# Altium PCB PiezoControlBoard.PcbDoc (part 2 of 3)
Units mm, origin at the board's own origin, x right, y up, seen from the top; angles counter-clockwise.
Board outline 90 x 115 mm, 4 copper layers (SIGNAL TOP, GND, PWR, SIGNAL BOT), stack 1.59 mm thick; 145 components, 86 nets, 512 pads, 287 vias.
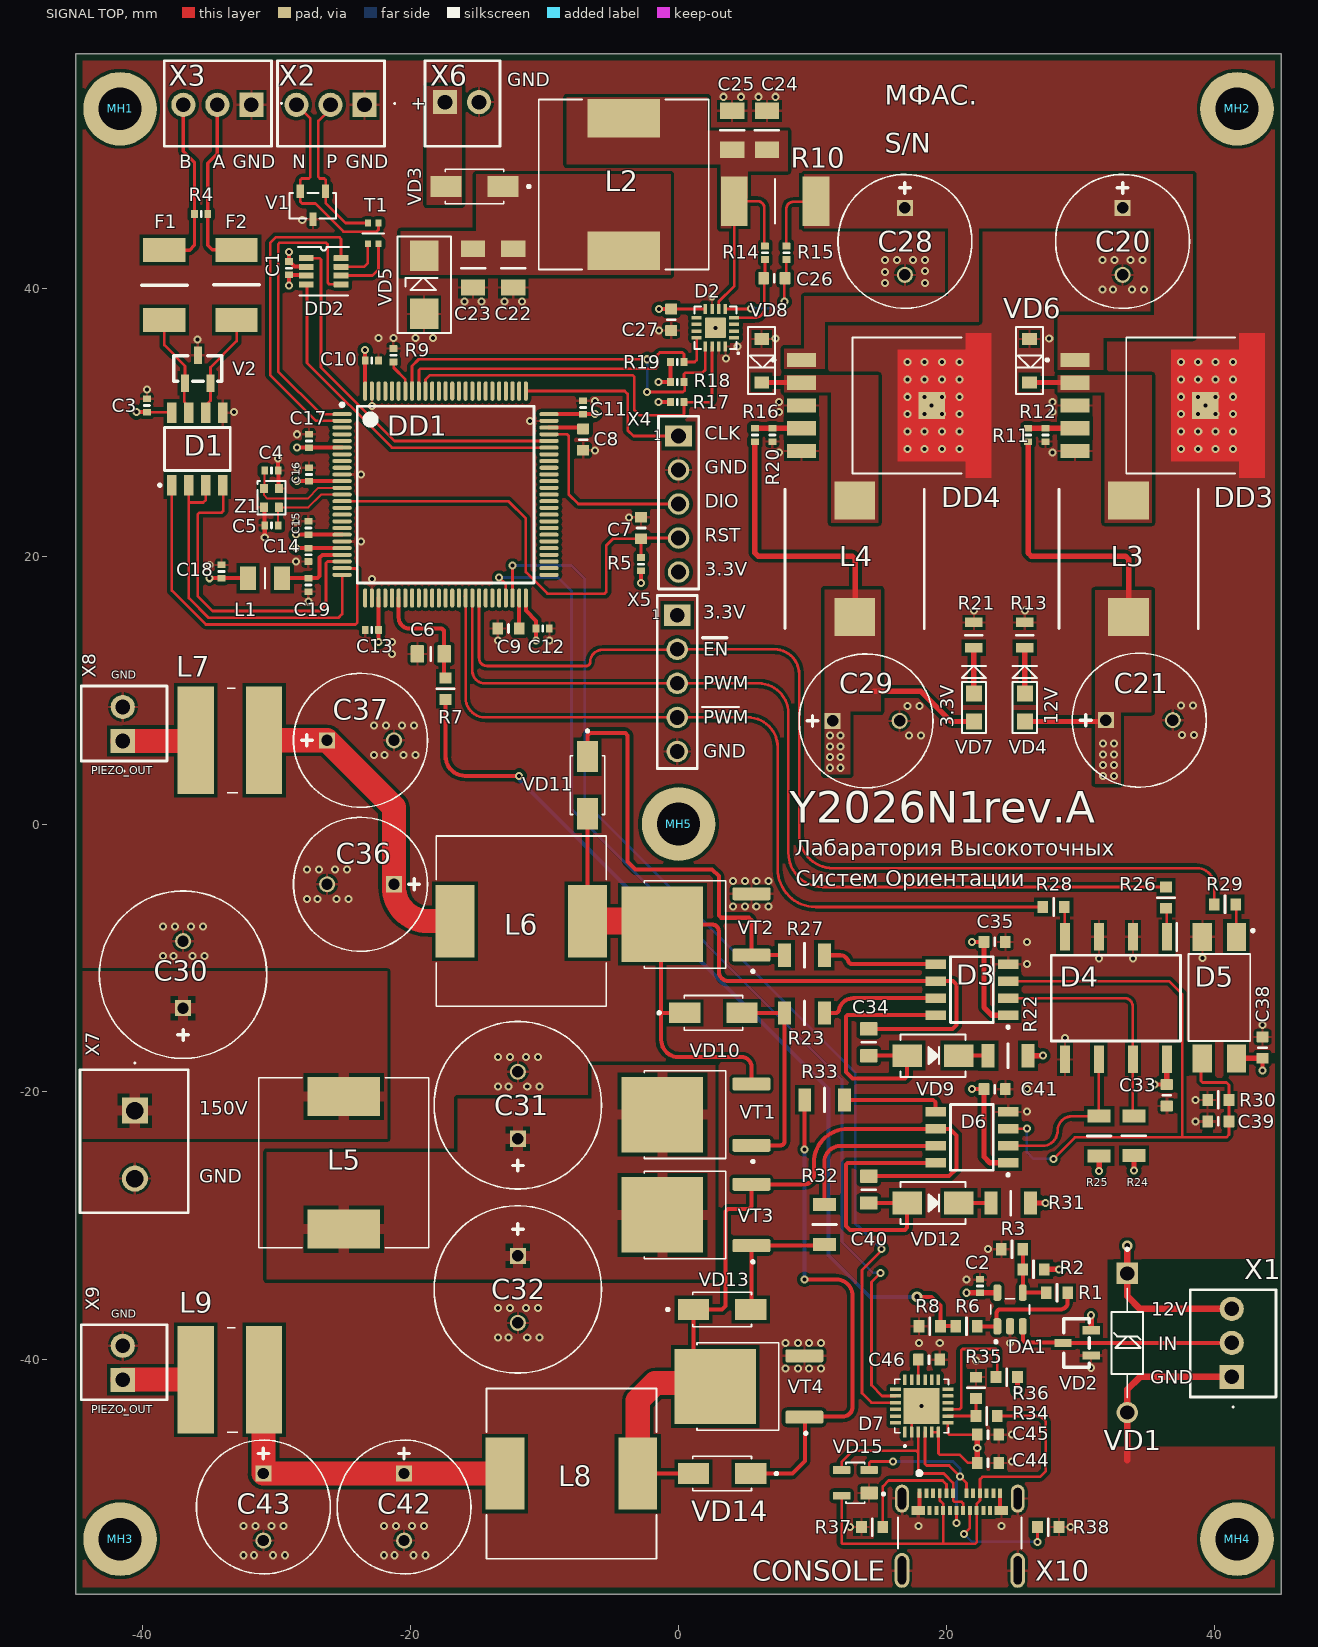
[diagram p0: SIGNAL TOP view]

## Part data (continued)
DA1: "Single Rail-to-Rail Operational Amplifier, SOT-23, TLV271IDBVR", Case/Package=SOT-23, Dual Supply Voltage=5V, Input Bias Current=60pA, Input Offset Voltage (Vos)=5mV, Manufacturer="Texas Instruments", Manufacturer Lifecycle Status=ACTIVE, Max Dual Supply Voltage=8V, Max Operating Temperature=125°C, Max Power Dissipation=201mW, Max Supply Voltage=16V, Min Dual Supply Voltage=1.35V, Min Operating Temperature=-40°C, Min Supply Voltage=2.7V, Nominal Supply Current=800µA, Operating Supply Current=625µA, Output Current=13mA, Power Supply Rejection Ratio (PSRR)=70dB, Supplier Part Number=2184654, Voltage Gain=110dB, Bandwidth=3MHz, Category="Amplifiers - Op Amps, Buffer, Instrumentation", Common Mode Rejection Ratio=69dB, ComponentLink1Description=https://sigma.octopart.com:443/177332311/technical_drawing/Texas-Instruments-TLV271IDBVR.pdf?src-supplier=Texas+Instruments, ComponentLink1URL=https://sigma.octopart.com:443/177332311/technical_drawing/Texas-Instruments-TLV271IDBVR.pdf?src-supplier=Texas+Instruments, ComponentLink2Description=https://octopart.com:443/opatz8j6/c1?t=xcKfiJBWjAmYsTfbSL-CzoOmzwEvjnPfYfSv82HYzKGs_6IgCZ6Y4Z1lF1bvJzEv39QWfXGgcZZnnapJK-Oyrd-ym6EThaYOJfbjIdY0gNOgQgkvB5ipi4TQKB-N_9Z4aF8oC4FEWWO1qQbGN_gEN6aHITD1x1gqD40gQs_ZLOpQbD32bAUiak8d48dFHYI_buWggoNQNLuwFJQIcVLm9iYp2q-f2WXUrehkCiEZXZGpi4kEl-P_ikKun8CbEnyYrMhl2WVMGYe1UiE5g9ZjThNOC2j0NOontvZ9pDSM0E2NdS-KvLoF94xRgWqBDz3UjNI_t0gqBymYZUMiW6_Jo37IGL5BO-oa7doWszXX2JJOG4V0X3qSIiHL2dBw451RtRk&src-supplier=Texas+Instruments, ComponentLink2URL=https://octopart.com:443/opatz8j6/c1?t=xcKfiJBWjAmYsTfbSL-CzoOmzwEvjnPfYfSv82HYzKGs_6IgCZ6Y4Z1lF1bvJzEv39QWfXGgcZZnnapJK-Oyrd-ym6EThaYOJfbjIdY0gNOgQgkvB5ipi4TQKB-N_9Z4aF8oC4FEWWO1qQbGN_gEN6aHITD1x1gqD40gQs_ZLOpQbD32bAUiak8d48dFHYI_buWggoNQNLuwFJQIcVLm9iYp2q-f2WXUrehkCiEZXZGpi4kEl-P_ikKun8CbEnyYrMhl2WVMGYe1UiE5g9ZjThNOC2j0NOontvZ9pDSM0E2NdS-KvLoF94xRgWqBDz3UjNI_t0gqBymYZUMiW6_Jo37IGL5BO-oa7doWszXX2JJOG4V0X3qSIiHL2dBw451RtRk&src-supplier=Texas+Instruments, ComponentLink3Description=https://sigma.octopart.com:443/175570406/technical_drawing/Texas-Instruments-TLV271IDBVR.pdf?src-supplier=Texas+Instruments, ComponentLink3URL=https://sigma.octopart.com:443/175570406/technical_drawing/Texas-Instruments-TLV271IDBVR.pdf?src-supplier=Texas+Instruments, ComponentLink4Description=https://sigma.octopart.com:443/169406034/technical_drawing/Texas-Instruments-TLV271IDBVR.pdf?src-supplier=Texas+Instruments, ComponentLink4URL=https://sigma.octopart.com:443/169406034/technical_drawing/Texas-Instruments-TLV271IDBVR.pdf?src-supplier=Texas+Instruments, ComponentLink5Description=https://sigma.octopart.com:443/155939316/technical_drawing/Texas-Instruments-TLV271IDBVR.pdf?src-supplier=Texas+Instruments, ComponentLink5URL=https://sigma.octopart.com:443/155939316/technical_drawing/Texas-Instruments-TLV271IDBVR.pdf?src-supplier=Texas+Instruments, ComponentLink6Description=https://sigma.octopart.com:443/102331370/technical_drawing/Texas-Instruments-TLV271IDBVR.pdf?src-supplier=Texas+Instruments, ComponentLink6URL=https://sigma.octopart.com:443/102331370/technical_drawing/Texas-Instruments-TLV271IDBVR.pdf?src-supplier=Texas+Instruments, ComponentLink7Description=https://sigma.octopart.com:443/49249325/technical_drawing/Texas-Instruments-TLV271IDBVR.pdf?src-supplier=Texas+Instruments, ComponentLink7URL=https://sigma.octopart.com:443/49249325/technical_drawing/Texas-Instruments-TLV271IDBVR.pdf?src-supplier=Texas+Instruments, ComponentLink8Description=https://datasheet.octopart.com:443/TLV271IDBVR-Texas-Instruments-datasheet-151134.pdf?src-supplier=Texas+Instruments, ComponentLink8URL=https://datasheet.octopart.com:443/TLV271IDBVR-Texas-Instruments-datasheet-151134.pdf?src-supplier=Texas+Instruments, ComponentLink9Description=https://datasheet.octopart.com:443/TLV271IDBVR-Texas-Instruments-datasheet-11536657.pdf?src-supplier=Upverter, ComponentLink9URL=https://datasheet.octopart.com:443/TLV271IDBVR-Texas-Instruments-datasheet-11536657.pdf?src-supplier=Upverter, ComponentLink10Description=https://datasheet.octopart.com:443/TLV271IDBVR.-Texas-Instruments-datasheet-66581739.pdf?src-supplier=element14+APAC, ComponentLink10URL=https://datasheet.octopart.com:443/TLV271IDBVR.-Texas-Instruments-datasheet-66581739.pdf?src-supplier=element14+APAC, ComponentLink11Description=https://datasheet.octopart.com:443/TLV271IDBVR.-Texas-Instruments-datasheet-62088949.pdf?src-supplier=element14+APAC, ComponentLink11URL=https://datasheet.octopart.com:443/TLV271IDBVR.-Texas-Instruments-datasheet-62088949.pdf?src-supplier=element14+APAC, ComponentLink12Description=https://datasheet.octopart.com:443/TLV271IDBVR.-Texas-Instruments-datasheet-37735837.pdf?src-supplier=Farnell, ComponentLink12URL=https://datasheet.octopart.com:443/TLV271IDBVR.-Texas-Instruments-datasheet-37735837.pdf?src-supplier=Farnell, ComponentLink13Description=https://datasheet.octopart.com:443/TLV271IDBVR-Texas-Instruments-datasheet-32026764.pdf?src-supplier=Farnell, ComponentLink13URL=https://datasheet.octopart.com:443/TLV271IDBVR-Texas-Instruments-datasheet-32026764.pdf?src-supplier=Farnell, ComponentLink14Description=https://datasheet.octopart.com:443/TLV271IDBVR-Texas-Instruments-datasheet-164418874.pdf?src-supplier=SHENGYU+ELECTRONICS, ComponentLink14URL=https://datasheet.octopart.com:443/TLV271IDBVR-Texas-Instruments-datasheet-164418874.pdf?src-supplier=SHENGYU+ELECTRONICS, ComponentLink15Description=https://datasheet.octopart.com:443/TLV271IDBVR-Texas-Instruments-datasheet-164361764.pdf?src-supplier=LCSC, ComponentLink15URL=https://datasheet.octopart.com:443/TLV271IDBVR-Texas-Instruments-datasheet-164361764.pdf?src-supplier=LCSC, ComponentLink16Description=https://datasheet.octopart.com:443/TLV271IDBVR-Texas-Instruments-datasheet-159117792.pdf?src-supplier=LCSC, ComponentLink16URL=https://datasheet.octopart.com:443/TLV271IDBVR-Texas-Instruments-datasheet-159117792.pdf?src-supplier=LCSC, ComponentLink17Description=https://datasheet.octopart.com:443/TLV271IDBVR-Texas-Instruments-datasheet-169977755.pdf?src-supplier=Burklin+Elektronik, ComponentLink17URL=https://datasheet.octopart.com:443/TLV271IDBVR-Texas-Instruments-datasheet-169977755.pdf?src-supplier=Burklin+Elektronik, ComponentLink18Description=https://datasheet.octopart.com:443/TLV271IDBVR-Texas-Instruments-datasheet-14138263.pdf?src-supplier=iiiC, ComponentLink18URL=https://datasheet.octopart.com:443/TLV271IDBVR-Texas-Instruments-datasheet-14138263.pdf?src-supplier=iiiC, ComponentLink19Description=https://datasheet.octopart.com:443/TLV271IDBVR-Texas-Instruments-datasheet-16079680.pdf?src-supplier=Factory+Futures, ComponentLink19URL=https://datasheet.octopart.com:443/TLV271IDBVR-Texas-Instruments-datasheet-16079680.pdf?src-supplier=Factory+Futures, ComponentLink20Description=https://datasheet.octopart.com:443/TLV271IDBVR-Texas-Instruments-datasheet-8443790.pdf?src-supplier=Jameco, ComponentLink20URL=https://datasheet.octopart.com:443/TLV271IDBVR-Texas-Instruments-datasheet-8443790.pdf?src-supplier=Jameco, ComponentLink21Description=https://datasheet.octopart.com:443/TLV271IDBVR-Texas-Instruments-datasheet-57216.pdf?src-supplier=DigiKey, ComponentLink21URL=https://datasheet.octopart.com:443/TLV271IDBVR-Texas-Instruments-datasheet-57216.pdf?src-supplier=DigiKey, ComponentLink22Description=https://datasheet.octopart.com:443/TLV271IDBVR-Texas-Instruments-datasheet-17699.pdf?src-supplier=Sierra+IC, ComponentLink22URL=https://datasheet.octopart.com:443/TLV271IDBVR-Texas-Instruments-datasheet-17699.pdf?src-supplier=Sierra+IC, ComponentLink23Description=http://sigma.octopart.com:80/reach_statement/Texas-Instruments-company-64.pdf?src-supplier=Compliance+Statements, ComponentLink23URL=http://sigma.octopart.com:80/reach_statement/Texas-Instruments-company-64.pdf?src-supplier=Compliance+Statements, ComponentLink24Description=http://sigma.octopart.com:80/conflict_mineral_statement/Texas-Instruments-company-63.pdf?src-supplier=Compliance+Statements, ComponentLink24URL=http://sigma.octopart.com:80/conflict_mineral_statement/Texas-Instruments-company-63.pdf?src-supplier=Compliance+Statements, Contact Plating=Gold, Gain Bandwidth Product=3MHz, Height=1.45mm, Lead Free="Lead Free", Length=2.9mm, Lifecycle Status=Production, Manufacturer Part Number=TLV271IDBVR, Max I/O Voltage=5mV, Nominal Gain Bandwidth Product=3MHz, Number of Amplifiers=1, Number of Channels=1, Number of Circuits=1, Number of Elements=1, Operating Supply Voltage=5V, Output Current per Channel=13mA, Packaging="Cut Tape", Pins=5, Power Dissipation=201mW, Pricing="10=0,505, 50=0,479, 100=0,432, 250=0,388, 500=0,369 (GBP)", Radiation Hardening=No, REACH SVHC=No, RoHS=Compliant, Schedule B="8542330000, 8542330000|8542330000|8542330000|8542330000|8542330000|8542330000|8542330000|8542330000|8542330000|8542330000|8542330000|8542330000|8542330000|8542330000|8542330000|8542330000|8542330000|8542330000|8542330000|8542330000|8542330000|8542330000|8542330000|85", Slew Rate=2.4V/µs, Stock=1000, Supplier=RS, Supplier 1=https://www.chipdip.ru/product/tlv271idbvr-texas-instruments-8001838236, Thickness=1.2mm, Width=1.6mm
DD1: "MCU 32-bit STM32F ARM Cortex M4F RISC 1024KB Flash 2.5V/3.3V 100-Pin LQFP Tray", Case/Package=LQFP, Clock Frequency=168MHz, Manufacturer=STMicroelectronics, Max Operating Temperature=85°C, Max Supply Voltage=3.6V, Min Operating Temperature=-40°C, Min Supply Voltage=1.8V, Nominal Supply Current=1.7uA, Package Quantity=90, Supplier Part Number=7468226, Address Bus Width=32b, Category=Microcontrollers, ComponentLink1Description=https://datasheet.ciiva.com/14132/stm32f407vgt6-tds-eng-14132567.pdf?src-supplier=Distrelec, ComponentLink1URL=https://datasheet.ciiva.com/14132/stm32f407vgt6-tds-eng-14132567.pdf?src-supplier=Distrelec, ComponentLink2Description=https://datasheet.ciiva.com/4842/dm00037051-492832-4842280.pdf?src-supplier=Mouser, ComponentLink2URL=https://datasheet.ciiva.com/4842/dm00037051-492832-4842280.pdf?src-supplier=Mouser, ComponentLink3Description=https://datasheet.ciiva.com/48687/001075599-da-01-en-mcu-32bt-1mb-stm32f407vgt6-lqfp-100-stm-48687547.pdf?src-supplier=Conrad, ComponentLink3URL=https://datasheet.ciiva.com/48687/001075599-da-01-en-mcu-32bt-1mb-stm32f407vgt6-lqfp-100-stm-48687547.pdf?src-supplier=Conrad, Core Architecture=ARM, Data Bus Width=32b, Frequency=168MHz, Height=1.45mm, Interface=I2C,SPI,USB,CAN,Ethernet,IrDA,UART,USART,LIN,EBI/EMI,I2S, Lead Free="Lead Free", Length=14.2mm, Manufacturer Part Number=STM32F407VGT6, Memory Format=FLASH, Memory Size=1024KB, Number of A/D Converters=3NUMBER, Number of ADC Channels=16, Number of Channels=16NUMBER, Number of D/A Converters=2NUMBER, Number of Ethernet Channels=1, Number of I2C Channels=3, Number of I/Os=82, Number of Programmable I/O=82, Number of PWM Channels=2, Number of SPI Channels=3, Number of Timers/Counters=14, Number of UART Channels=2, Number of USB Channels=1NUMBER, Oscillator Type=Internal, Packaging=Tray, Peripherals="Brown-out Detect/Reset,POR,PWM,WDT,DMA,LCD,I2C", Pins=100, Pricing="1=10,95, 10=10,07, 25=9,66, 100=8,5, 250=8,28 (GBP)", Radiation Hardening=No, RAM Size=196KB, Reach SVHC Compliant=No, RoHS=Yes, RoHS Compliant=Yes, Series="STM32 F4", Stock=813, Supplier 1=https://www.chipdip.ru/product/stm32f407vgt6, Watchdog Timer=Yes, Width=14.2mm
DD2: "EAR99 TCAN330 Tape & Reel (TR) CANbus interface transceiver 3.3V 1.45mm 1Mbps -40C~125C", Manufacturer="Texas Instruments", Category="Interface ICs", ComponentLink1Description=http://www.ti.com/lit/ds/symlink/tcan330.pdf?src-supplier=Digikey, ComponentLink1URL=http://www.ti.com/lit/ds/symlink/tcan330.pdf?src-supplier=Digikey, ComponentLink2Description=http://www.ti.com/general/docs/suppproductinfo.tsp?distId=10&amp;gotoUrl=http%3A%2F%2Fwww.ti.com%2Flit%2Fgpn%2Ftcan330&src-supplier=Digikey, ComponentLink2URL=http://www.ti.com/general/docs/suppproductinfo.tsp?distId=10&amp;gotoUrl=http%3A%2F%2Fwww.ti.com%2Flit%2Fgpn%2Ftcan330&src-supplier=Digikey, ComponentLink3Description=http://www.ti.com/general/docs/lit/getliterature.tsp?genericPartNumber=TCAN330&amp;&amp;fileType=pdf&src-supplier=Farnell, ComponentLink3URL=http://www.ti.com/general/docs/lit/getliterature.tsp?genericPartNumber=TCAN330&amp;&amp;fileType=pdf&src-supplier=Farnell, ComponentLink4Description=http://www.ti.com/general/docs/lit/getliterature.tsp?genericPartNumber=TCAN330&&fileType=pdf&src-supplier=Element14, ComponentLink4URL=http://www.ti.com/general/docs/lit/getliterature.tsp?genericPartNumber=TCAN330&&fileType=pdf&src-supplier=Element14, Height=1.45mm, Length=2.9mm, Manufacturer Part Number=TCAN330DCNT, Pricing 1="1=2,386, 10=1,915, 25=1,65 (USD)", RoHS=Yes, Stock 1=49, Supplier 1=https://www.chipdip.ru/product0/8005011845, Supplier Part Number 1=TCAN330DCNT, Thickness=1.1mm, Width=1.63mm
DD3: "LM2575HVR-12, Понижающий DC-DC преобразователь, Uвх=до 60В, Uвых=+12В, 1А, 52кГц [TO-263-5L] (=LM2575HVS-12)", Supplier 1=https://www.chipdip.ru/product/lm2575hvr-12-ponizhayuschiy-dc-dc-preobrazovatel-uvh-do-htc-9001087020
DD4: "LM2575HVS-3.3, Понижающий DC-DC преобразователь, Uвх=до 60В, Uвых=3.3В, 1А, 52кГц [TO-263-5L]", Supplier 1=https://www.chipdip.ru/product/lm2575hvs-3.3-ponizhayuschiy-dc-dc-preobrazovatel-umw-9001231209
F1 F2: "PTC Resettable Fuse 0.2A(hold) 0.4A(trip) 60VDC 40A 0.8W 0.02s 0.8Ohm SMD Solder Pad 1812 T/R", Case Code (Imperial)=1812, Case Code (Metric)=4532, Hold Current=200mA, Manufacturer=Littelfuse, Max Current Rating=40A, Max Operating Temperature=85°C, Max Voltage Rating (DC)=30V, Maximum Resistance 1 Hour (R1max)=4.4Ω, Min Operating Temperature=-40°C, Minimum Resistance Initial (Rmin)=1.4Ω, Power Dissipation=800mW, Supplier Part Number 1=9134053, Trip Current=400mA, Working Voltage=60V, Approvals="TUV, cULus", Case/Package=1812, Category="PTC Resettable Fuses", ComponentLink1Description=https://datasheet.octopart.com:443/1812L020-60DR-Littelfuse-datasheet-181956373.pdf?src-supplier=IHS, ComponentLink1URL=https://datasheet.octopart.com:443/1812L020-60DR-Littelfuse-datasheet-181956373.pdf?src-supplier=IHS, ComponentLink2Description=https://datasheet.octopart.com:443/1812L020-60DR-Littelfuse-datasheet-165518607.pdf?src-supplier=Farnell, ComponentLink2URL=https://datasheet.octopart.com:443/1812L020-60DR-Littelfuse-datasheet-165518607.pdf?src-supplier=Farnell, ComponentLink3Description=https://datasheet.octopart.com:443/1812L020-60DR-Littelfuse-datasheet-95953547.pdf?src-supplier=Farnell, ComponentLink3URL=https://datasheet.octopart.com:443/1812L020-60DR-Littelfuse-datasheet-95953547.pdf?src-supplier=Farnell, ComponentLink4Description=https://datasheet.octopart.com:443/1812L020-60DR-Littelfuse-datasheet-81917122.pdf?src-supplier=Farnell, ComponentLink4URL=https://datasheet.octopart.com:443/1812L020-60DR-Littelfuse-datasheet-81917122.pdf?src-supplier=Farnell, ComponentLink5Description=https://datasheet.octopart.com:443/1812L020-60DR-Littelfuse-datasheet-133510347.pdf?src-supplier=TME, ComponentLink5URL=https://datasheet.octopart.com:443/1812L020-60DR-Littelfuse-datasheet-133510347.pdf?src-supplier=TME, ComponentLink6Description=https://datasheet.octopart.com:443/1812L020-60DR-Littelfuse-datasheet-183575728.pdf?src-supplier=Sager+Electronics, ComponentLink6URL=https://datasheet.octopart.com:443/1812L020-60DR-Littelfuse-datasheet-183575728.pdf?src-supplier=Sager+Electronics, ComponentLink7Description=https://datasheet.octopart.com:443/1812L020-60DR-Littelfuse-datasheet-175882318.pdf?src-supplier=Sager+Electronics, ComponentLink7URL=https://datasheet.octopart.com:443/1812L020-60DR-Littelfuse-datasheet-175882318.pdf?src-supplier=Sager+Electronics, ComponentLink8Description=https://datasheet.octopart.com:443/1812L020-60DR-Littelfuse-datasheet-177174290.pdf?src-supplier=Burklin+Elektronik, ComponentLink8URL=https://datasheet.octopart.com:443/1812L020-60DR-Littelfuse-datasheet-177174290.pdf?src-supplier=Burklin+Elektronik, ComponentLink9Description=https://datasheet.octopart.com:443/1812L020-60DR-Littelfuse-datasheet-24577145.pdf?src-supplier=Future+Electronics, ComponentLink9URL=https://datasheet.octopart.com:443/1812L020-60DR-Littelfuse-datasheet-24577145.pdf?src-supplier=Future+Electronics, ComponentLink10Description=https://datasheet.octopart.com:443/1812L020-60DR-Littelfuse-datasheet-11773851.pdf?src-supplier=Fuses+Unlimited, ComponentLink10URL=https://datasheet.octopart.com:443/1812L020-60DR-Littelfuse-datasheet-11773851.pdf?src-supplier=Fuses+Unlimited, ComponentLink11Description=https://datasheet.octopart.com:443/1812L020-60DR-Littelfuse-datasheet-10288713.pdf?src-supplier=Fuses+Unlimited, ComponentLink11URL=https://datasheet.octopart.com:443/1812L020-60DR-Littelfuse-datasheet-10288713.pdf?src-supplier=Fuses+Unlimited, ComponentLink12Description=https://datasheet.octopart.com:443/1812L020-60DR-Littelfuse-datasheet-8764218.pdf?src-supplier=Fuses+Unlimited, ComponentLink12URL=https://datasheet.octopart.com:443/1812L020-60DR-Littelfuse-datasheet-8764218.pdf?src-supplier=Fuses+Unlimited, ComponentLink13Description=https://datasheet.octopart.com:443/1812L020-60DR-Littelfuse-datasheet-8701984.pdf?src-supplier=Fuses+Unlimited, ComponentLink13URL=https://datasheet.octopart.com:443/1812L020-60DR-Littelfuse-datasheet-8701984.pdf?src-supplier=Fuses+Unlimited, ComponentLink14Description=https://datasheet.octopart.com:443/1812L020-60DR-Littelfuse-datasheet-8499982.pdf?src-supplier=Fuses+Unlimited, ComponentLink14URL=https://datasheet.octopart.com:443/1812L020-60DR-Littelfuse-datasheet-8499982.pdf?src-supplier=Fuses+Unlimited, ComponentLink15Description=https://datasheet.octopart.com:443/1812L020-60DR-Littelfuse-datasheet-8330599.pdf?src-supplier=Fuses+Unlimited, ComponentLink15URL=https://datasheet.octopart.com:443/1812L020-60DR-Littelfuse-datasheet-8330599.pdf?src-supplier=Fuses+Unlimited, ComponentLink16Description=https://datasheet.octopart.com:443/1812L020-60DR-Littelfuse-datasheet-560439.pdf?src-supplier=Fuses+Unlimited, ComponentLink16URL=https://datasheet.octopart.com:443/1812L020-60DR-Littelfuse-datasheet-560439.pdf?src-supplier=Fuses+Unlimited, Country of Origin=Taiwan, Export Control Classification Number (ECCN) Code=EAR99, Harmonized Tariff Schedule (HTS) Code=8533.40.80.70, Height=1.25mm, Introduction Date=2012-08-07, Lead Free="Lead Free", Lifecycle Status=Production, Manufacturer Part Number=1812L020/60DR, Mount="Surface Mount", Number of Terminals=2, Packaging="Tape & Reel (TR)", Pricing 1="1500=0,187, 3000=0,185, 6000=0,182, 22500=0,177 (USD)", REACH SVHC=Yes, Resistance=1.4Ω, RoHS=Compliant, Supplier="Future Electronics", Supplier 1=https://www.chipdip.ru/product/1812l020-60dr-0.2a-60v-predohranitel-littelfuse-9000254948?from=similar_product_auto, Termination=SMD/SMT, Time to Trip=2s, Width=3.41mm
L1: library part CVH252009-4R7M, "Inductor Power Chip Shielded Multi-Layer 4.7uH 20% 1MHz Ferrite 1.1A 110mOhm DCR 1008 T/R", Manufacturer=Bourns, Supplier Part Number=1808878, Category="Fixed Inductors", ComponentLink1Description=https://datasheet.ciiva.com/8003/1610598-8003733.pdf?src-supplier=Element14, ComponentLink1URL=https://datasheet.ciiva.com/8003/1610598-8003733.pdf?src-supplier=Element14, ComponentLink2Description=https://datasheet.ciiva.com/7849/1610598-7849319.pdf?src-supplier=Element14, ComponentLink2URL=https://datasheet.ciiva.com/7849/1610598-7849319.pdf?src-supplier=Element14, ComponentLink3Description=https://datasheet.ciiva.com/22874/70301233-22874397.pdf?src-supplier=Allied+Electronics, ComponentLink3URL=https://datasheet.ciiva.com/22874/70301233-22874397.pdf?src-supplier=Allied+Electronics, ComponentLink4Description=https://datasheet.ciiva.com/3079/cvh-3079748.pdf?src-supplier=Avnet, ComponentLink4URL=https://datasheet.ciiva.com/3079/cvh-3079748.pdf?src-supplier=Avnet, Manufacturer Part Number=CVH252009-4R7M, Pricing="3000=25,352 (RUB)", RoHS=Yes, Stock=495, Supplier=Rs, Supplier 1=https://www.chipdip.ru/product0/8002027222
L2: "SMD Low Loss Power Inductor", Manufacturer=Codaca, Supplier Part Number=4044-SPRH127-101MCT-ND, Manufacturer Part Number=SPRH127-101M, Pricing="1=1,13, 10=0,93, 100=0,7645 (USD)", RoHS=No, Stock=3159, Supplier=Digikey, Supplier 1=https://www.chipdip.ru/product/sprh127-101m-100
L3 L4: library part B82464G4104M000, "Inductor Power Shielded Wirewound 100uH 20% 100KHz Ferrite 1.05A 0.22Ohm DCR Automotive T/R", Case/Package=SMD/SMT, DC Current=1.05A, DC Resistance (DCR)=220mΩ, Inductance=100µH, Inductance Tolerance=20%, Manufacturer=EPCOS, Max Operating Temperature=125°C, Min Operating Temperature=-55°C, Saturation Current=1.15A, Self Resonant Frequency=6.5MHz, Supplier Part Number 1=4960669, Test Frequency=100kHz, Category="Fixed Inductors", China RoHS=Compliant, ComponentLink1Description=https://datasheet.octopart.com:443/B82464G4104M000-EPCOS-datasheet-138895962.pdf?src-supplier=IHS, ComponentLink1URL=https://datasheet.octopart.com:443/B82464G4104M000-EPCOS-datasheet-138895962.pdf?src-supplier=IHS, ComponentLink2Description=https://datasheet.octopart.com:443/B82464G4104M000-EPCOS-datasheet-12510517.pdf?src-supplier=Newark, ComponentLink2URL=https://datasheet.octopart.com:443/B82464G4104M000-EPCOS-datasheet-12510517.pdf?src-supplier=Newark, ComponentLink3Description=https://datasheet.octopart.com:443/B82464G4104M000-EPCOS-datasheet-10671.pdf?src-supplier=Newark, ComponentLink3URL=https://datasheet.octopart.com:443/B82464G4104M000-EPCOS-datasheet-10671.pdf?src-supplier=Newark, ComponentLink4Description=https://datasheet.octopart.com:443/B82464G4104M000-EPCOS-datasheet-8324944.pdf?src-supplier=Future+Electronics, ComponentLink4URL=https://datasheet.octopart.com:443/B82464G4104M000-EPCOS-datasheet-8324944.pdf?src-supplier=Future+Electronics, ComponentLink5Description=https://datasheet.octopart.com:443/B82464G4104M000-EPCOS-datasheet-47871567.pdf?src-supplier=Future+Electronics, ComponentLink5URL=https://datasheet.octopart.com:443/B82464G4104M000-EPCOS-datasheet-47871567.pdf?src-supplier=Future+Electronics, ComponentLink6Description=https://datasheet.octopart.com:443/B82464G4104M000-EPCOS-datasheet-38579530.pdf?src-supplier=element14+APAC, ComponentLink6URL=https://datasheet.octopart.com:443/B82464G4104M000-EPCOS-datasheet-38579530.pdf?src-supplier=element14+APAC, ComponentLink7Description=https://datasheet.octopart.com:443/B82464G4104M-EPCOS-datasheet-714.pdf?src-supplier=TME, ComponentLink7URL=https://datasheet.octopart.com:443/B82464G4104M-EPCOS-datasheet-714.pdf?src-supplier=TME, ComponentLink8Description=https://datasheet.octopart.com:443/B82464G4104M-EPCOS-datasheet-519163.pdf?src-supplier=Farnell, ComponentLink8URL=https://datasheet.octopart.com:443/B82464G4104M-EPCOS-datasheet-519163.pdf?src-supplier=Farnell, ComponentLink9Description=https://datasheet.octopart.com:443/B82464G4104M-EPCOS-datasheet-499776.pdf?src-supplier=Farnell, ComponentLink9URL=https://datasheet.octopart.com:443/B82464G4104M-EPCOS-datasheet-499776.pdf?src-supplier=Farnell, ComponentLink10Description=https://datasheet.octopart.com:443/B82464-G4104-M-EPCOS-datasheet-550296.pdf?src-supplier=Verical, ComponentLink10URL=https://datasheet.octopart.com:443/B82464-G4104-M-EPCOS-datasheet-550296.pdf?src-supplier=Verical, Contact Plating=Tin, Core Material=Ferrite, Country of Origin=Germany, Depth=10.4mm, Export Control Classification Number (ECCN) Code=EAR99, Harmonized Tariff Schedule (HTS) Code=8504.50.80.00, Height=4.8mm, Introduction Date=2002-08-13, Lead Free="Lead Free", Length=10.4mm, Lifecycle Status=EOL, Manufacturer Part Number=B82464G4104M000, Max Current Rating=1.05A, Max DC Current=1.05A, Max Length=10.4mm, Max Width=10.4mm, Military Standard=Not, Mount="Surface Mount", Number of Circuits=1, Number of Pins=2, Number of Terminals=2, Packaging="Cut Tape", Pricing 1="1=1,09 (GBP)", REACH SVHC=Yes, Resistance=220mΩ, RMS Current (Irms)=1.05A, RoHS=Compliant, Schedule B="8504500000, 8504500000|8504500000|8504500000|8504500000|8504500000", Stock 1=363, Supplier=RS, Supplier 1=https://www.chipdip.ru/product/b82464g4104m-100mkgn-1.05a-10x10-katushka-epcos-759264303?from=visited_product, Tolerance=20%, Width=10.4mm
L5 L6 L8: "220мкГн, 2.22А, 12.3х12.3х8 мм, Катушка индуктивности SMD", Current - Saturation (Isat)=2.22A, Current Rating (Amps)=1.63A, Inductance=220мкГн, Supplier 1=https://www.chipdip.ru/product/cdsprh127-221m-220mkgn-2.22a-12.3x12.3x8-mm-katushka-sce-9001493335
L7 L9: "330мкГн, 0.4А, Индуктивность SMD", Current - Saturation (Isat)="580 mA", Current Rating (Amps)="400 mA", Inductance=300мкГн, Supplier 1=https://www.chipdip.ru/product/sdr0805-331kl-330mkgn-0.4a-induktivnost-smd-bourns-9000090969
MH1 MH2 MH3 MH4 MH5: "отверстие М3"
R1: library part Res_0603, "Резистор", Manufacturer Part Number=RC0603FR-0747KL, Power=0.1Вт, Tolerance=1%, Supplier 1=https://www.chipdip.ru/product/0.1vt-0603-47-kom-1-rc0603fr-0747kl-chip-rezistor-smd-yageo-9000260524
R2 R3: library part Res_0603, "Резистор", Manufacturer Part Number=RC0603FR-0720KL, Power=0.1Вт, Tolerance=1%, Supplier 1=https://www.chipdip.ru/product/0.1vt-0603-20-kom-1-rc0603fr-0720kl-chip-rezistor-smd-yageo-9000396126
R4: library part Res_0402, "Резистор", Manufacturer Part Number=RC0402FR-07120RL, Power=0.062Вт, Tolerance=1%, Supplier 1=https://www.chipdip.ru/product/0.062w-0402-120-om-1
R5: library part Res_0402, "Резистор", Manufacturer Part Number=RC0402JR-074K7L, Power="0.062 Вт", Tolerance=5%, Supplier 1=https://www.chipdip.ru/product/0.062w-0402-4.7-kom-5
R6: library part Res_0603, "Резистор", Manufacturer Part Number=RC0603FR-0727KL, Power=0.1Вт, Tolerance=1%, Supplier 1=https://www.chipdip.ru/product/0.1vt-0603-27-kom-1-rc0603fr-0727kl-chip-rezistor-smd-yageo-9000339200
R7: library part Res_0603, "Резистор", Manufacturer Part Number=RC0603FR-07220RL, Power=0.1Вт, Tolerance=1%, Supplier 1=https://www.chipdip.ru/product/0.1vt-0603-220-om-1-rc0603fr-07220rl-chip-rezistor-yageo-9000179829
R8: library part Res_0603, "Резистор", Manufacturer Part Number=RT0603BRD0710KL, Power=0.1Вт, Tolerance=0.1%, Supplier 1=https://www.chipdip.ru/product/0.1vt-0603-10-kom-0.1-rt0603brd0710kl-chip-rezistor-yageo-9001548802
R9 R11 R16: library part Res_0402, "Резистор", Manufacturer Part Number=RC0402JR-070RL, Power="0.062 Вт", Tolerance=5%, Supplier 1=https://www.chipdip.ru/product/0.062w-0402-0-om-5
R10: library part Res_2512, "Резистор", Manufacturer Part Number=CRA2512-FZ-R020ELF, Power="3 Вт", Tolerance=1%, Supplier 1=https://www.chipdip.ru/product0/8002006585
R12 R20: library part Res_0402, "Резистор", Manufacturer Part Number=-, Power=-, Supplier 1=-, Tolerance=-
R13: library part Res_0805, "Резистор", Manufacturer Part Number=RC0805FR-073K01L, Power=0.125Вт, Tolerance=1%, Supplier 1=https://www.chipdip.ru/product0/8013608452
R14 R15: library part Res_0402, "Резистор", Manufacturer Part Number=RC0402JR-074R7L, Power="0.062 Вт", Tolerance=5%, Supplier 1=https://www.chipdip.ru/product/0.062w-0402-4.7-om-5
R17 R18 R19: library part Res_0402, "Резистор", Manufacturer Part Number=RC0402JR-074K7L, Power=0.062Вт, Tolerance=5%, Supplier 1=https://www.chipdip.ru/product/0.062w-0402-4.7-kom-5
R21: library part Res_0805, "Резистор", Manufacturer Part Number=CR0805-FX-1001ELF, Power=0.125Вт, Tolerance=1%, Supplier 1=https://www.chipdip.ru/product0/8003688062
R22 R31: library part Res_1206, "Резистор", Manufacturer Part Number=RC1206JR-071RL, Power=0.25Вт, Tolerance=5%, Supplier 1=https://www.chipdip.ru/product/0.25vt-1206-1-om-5-rc1206jr-071rl-chip-rezistor-smd-yageo-9000226200
R23 R27 R32 R33: library part Res_1206, "Резистор", Manufacturer Part Number=RC1206JR-0733RL, Power=0,25Вт, Tolerance=5%, Supplier 1=https://www.chipdip.ru/product/0.25vt-1206-33-om-5-rc1206jr-0733rl-chip-rezistor-smd-yageo-9000247852
R24 R25: library part Res_1206, "Резистор", Manufacturer Part Number=RC1206JR-07820RL, Power=0.25Вт, Tolerance=5%, Supplier 1=https://www.chipdip.ru/product/0.25vt-1206-820-om-5-rc1206jr-07820rl-chip-rezistor-yageo-9000956179
R26 R28 R29: library part Res_0603, "Резистор", Manufacturer Part Number=AS03W4J0391T5E, Power=250мВт, Tolerance=5%, Supplier 1=https://www.chipdip.ru/product/as03w4j0391t5e-tolstoplenochnyy-rezistor-250mvt-uni-royal-8016244225
R30: library part Res_0603, "Резистор", Manufacturer Part Number=RC0603JR-0710KL, Power=0.1Вт, Tolerance=5%, Supplier 1=https://www.chipdip.ru/product/0.1vt-0603-10-kom-5-rc0603jr-0710kl-chip-rezistor-smd-yageo-9000103456
R34: library part Res_0603, "Резистор", Manufacturer Part Number=RC0603FR-0724KL, Power="0.1 Вт", Tolerance=1%, Supplier 1=https://www.chipdip.ru/product/0.1w-0603-24-kom-1
R35: library part Res_0603, "Резистор", Manufacturer Part Number=RC0603FR-0747KL, Power="0.1 Вт", Tolerance=1%, Supplier 1=https://www.chipdip.ru/product/0.1w-0603-47-kom-1
R36: library part Res_0603, "Резистор", Manufacturer Part Number=RC0603FR-074K7L, Power="0.1 Вт", Tolerance=1%, Supplier 1=https://www.chipdip.ru/product/0.1w-0603-4.7-kom-1
R37 R38: library part Res_0603, "Резистор", Manufacturer Part Number=RC0603FR-075K1L, Power="0.1 Вт", Tolerance=1%, Supplier 1=https://www.chipdip.ru/product/0.1w-0603-5.1-kom-1
T1: "Ind Common Mode Choke Shielded Wirewound 920 Ohm 25% 100MHz 160mA 0805 Emboss T/R", Manufacturer=Murata, Max Current Rating=160mA, Max Operating Temperature=85°C, Min Operating Temperature=-40°C, Supplier Part Number 1=81-DLW21SN921SK2L, Voltage Rating (DC)=50V, Category="Common Mode Chokes", ComponentLink1Description=https://datasheet.octopart.com/DLW21SN921SK2L-Murata-datasheet-141273720.pdf?src-supplier=Element14, ComponentLink1URL=https://datasheet.octopart.com/DLW21SN921SK2L-Murata-datasheet-141273720.pdf?src-supplier=Element14, ComponentLink2Description=https://www.murata.com/en-us/products/productdata/8796756803614/EFLC0015.pdf?src-supplier=Digikey, ComponentLink2URL=https://www.murata.com/en-us/products/productdata/8796756803614/EFLC0015.pdf?src-supplier=Digikey, ComponentLink3Description=https://datasheet.octopart.com/DLW21SN921SK2L-Murata-datasheet-138902087.pdf?src-supplier=Future+Electronics, ComponentLink3URL=https://datasheet.octopart.com/DLW21SN921SK2L-Murata-datasheet-138902087.pdf?src-supplier=Future+Electronics, Impedance=920R, Length=2mm, Manufacturer Part Number=DLW21SN921SK2L, Mount="Surface Mount", Number of Lines=2, Packaging="Cut Tape", Pricing 1="1=0,49, 10=0,358, 50=0,358, 100=0,258, 1000=0,22, 10000=0,186 (USD)", RoHS=Yes, RoHS Compliant=Yes, Series=DLW21, Stock 1=6756, Supplier 1=https://www.chipdip.ru/product0/8004176754, Width=1.2mm

## Text inside footprints (layer, text, board x,y; h text height)
X4: Top Overlay "1" at -1.9,28.67 h0.7
X5: Top Overlay "1" at -2,15.28 h0.7
X10: Assembly Notes "PCB Edge" at 26.4,-57.23 h1